# Altium PCB PADS_PCB_Yalovskyi.PcbDoc
Units mm, origin at the board's own origin, x right, y up, seen from the top; angles counter-clockwise.
Board outline 35 x 35 mm, 4 copper layers (Top Layer, PWR, GND, Bottom Layer), stack 0.603 mm thick; 57 components, 41 nets, 212 pads, 76 vias.
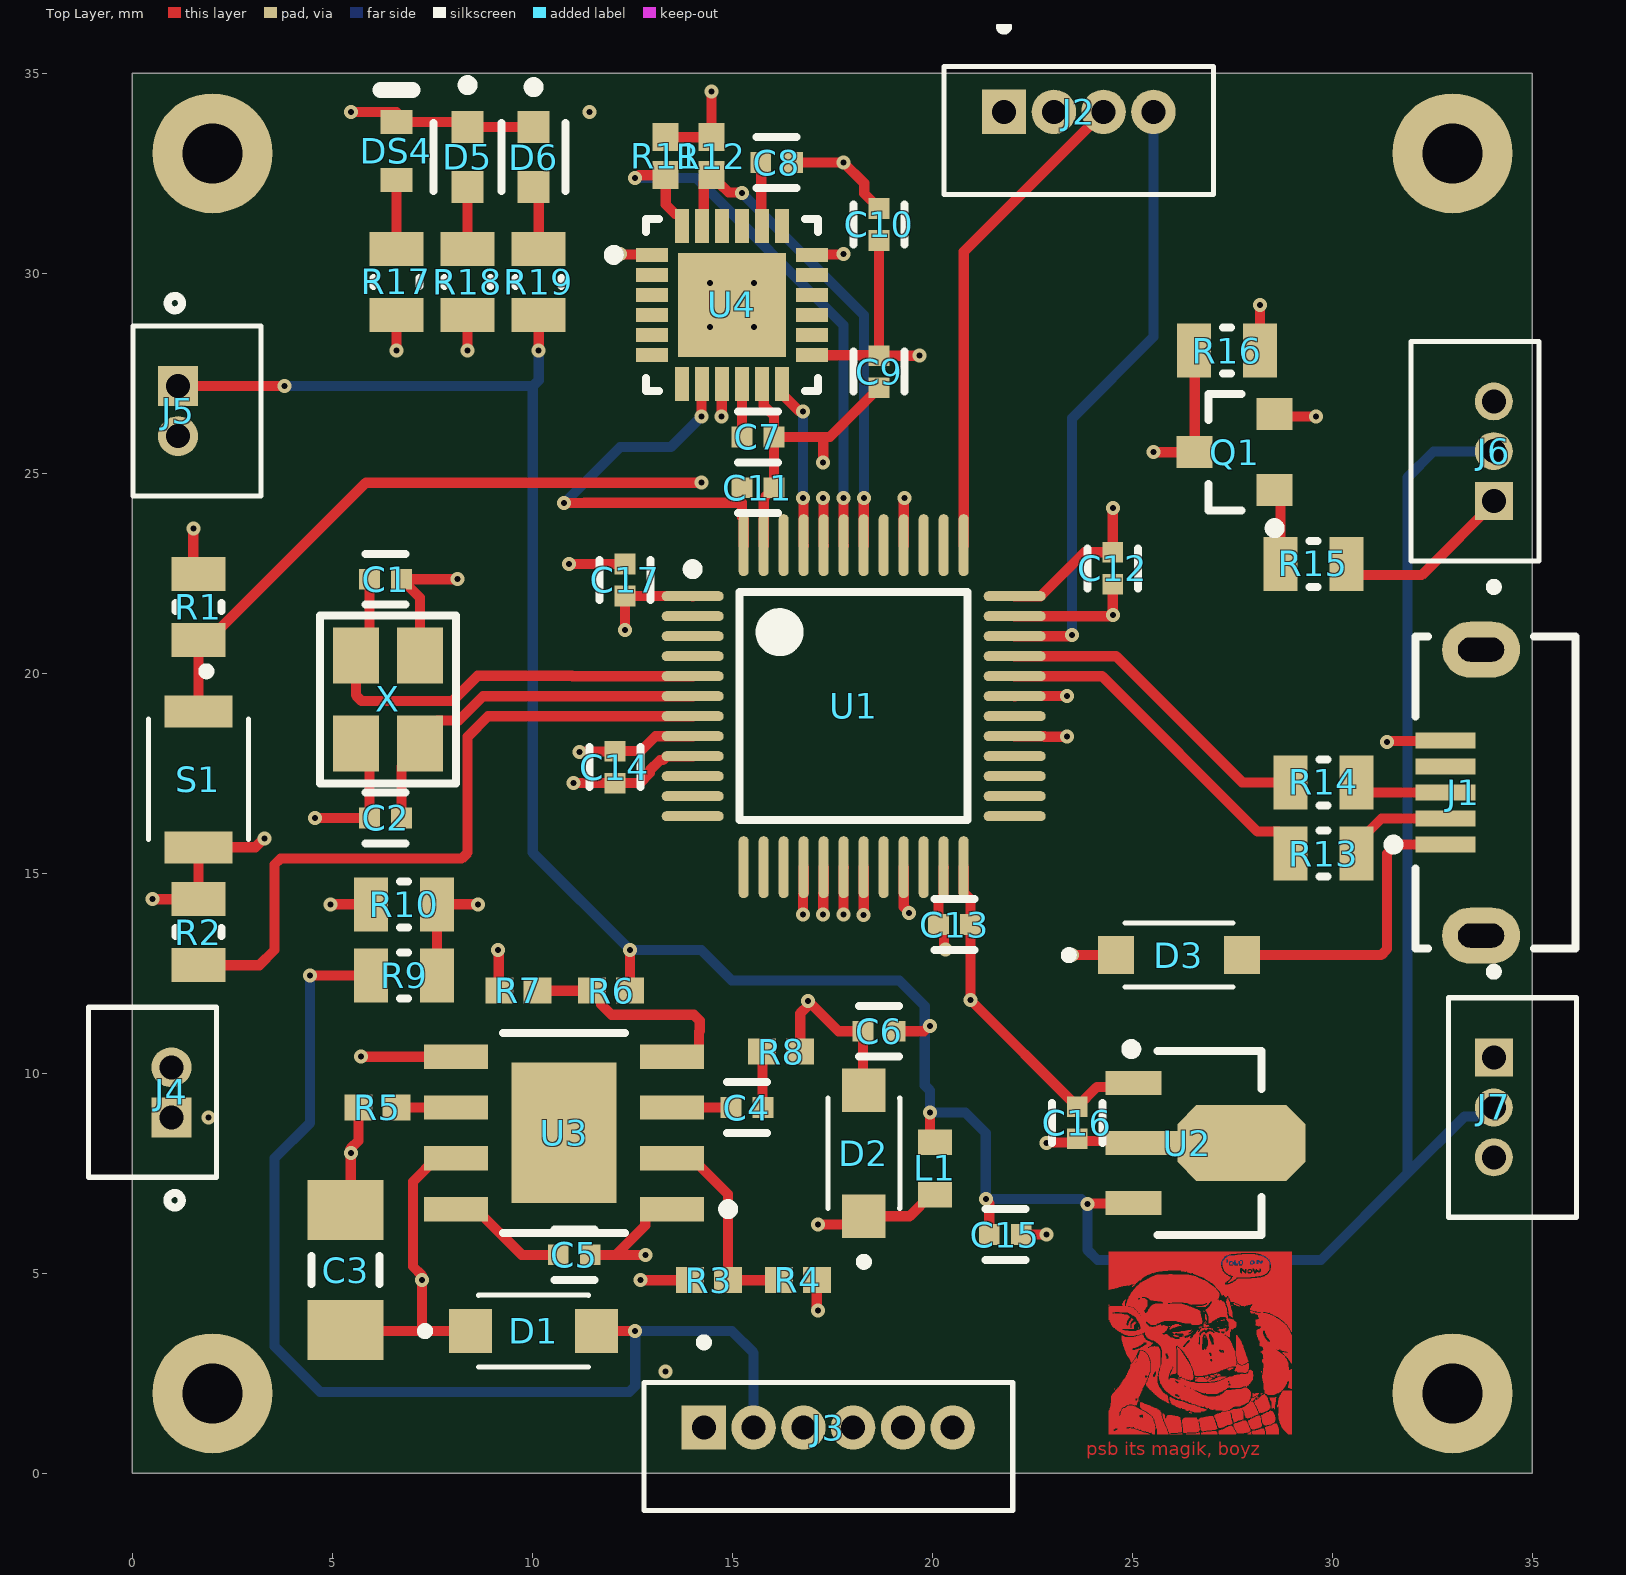
[diagram p0: Top Layer view]
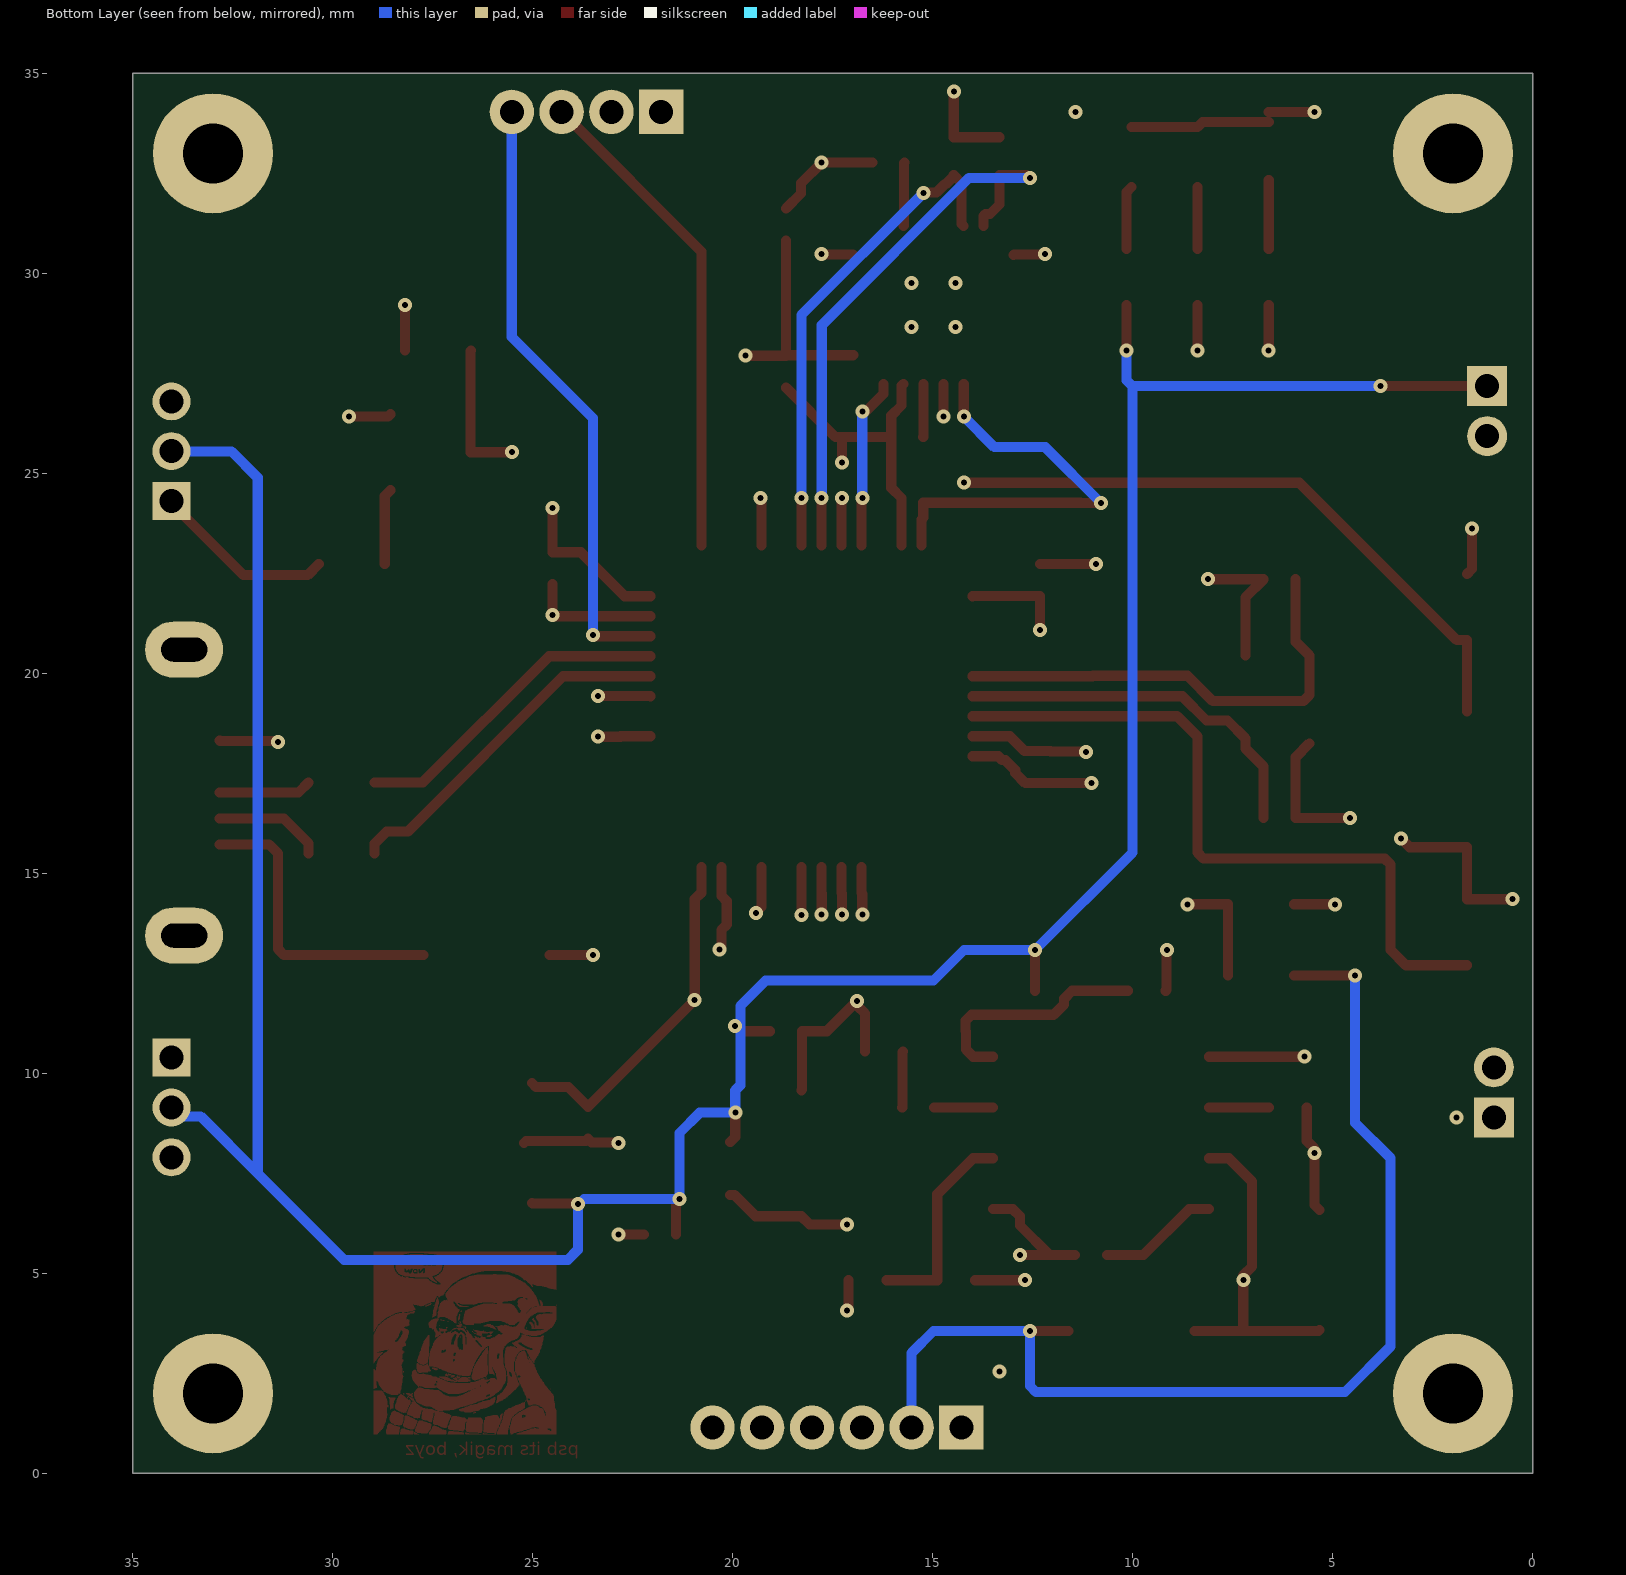
[diagram p1: Bottom Layer view, seen from below]
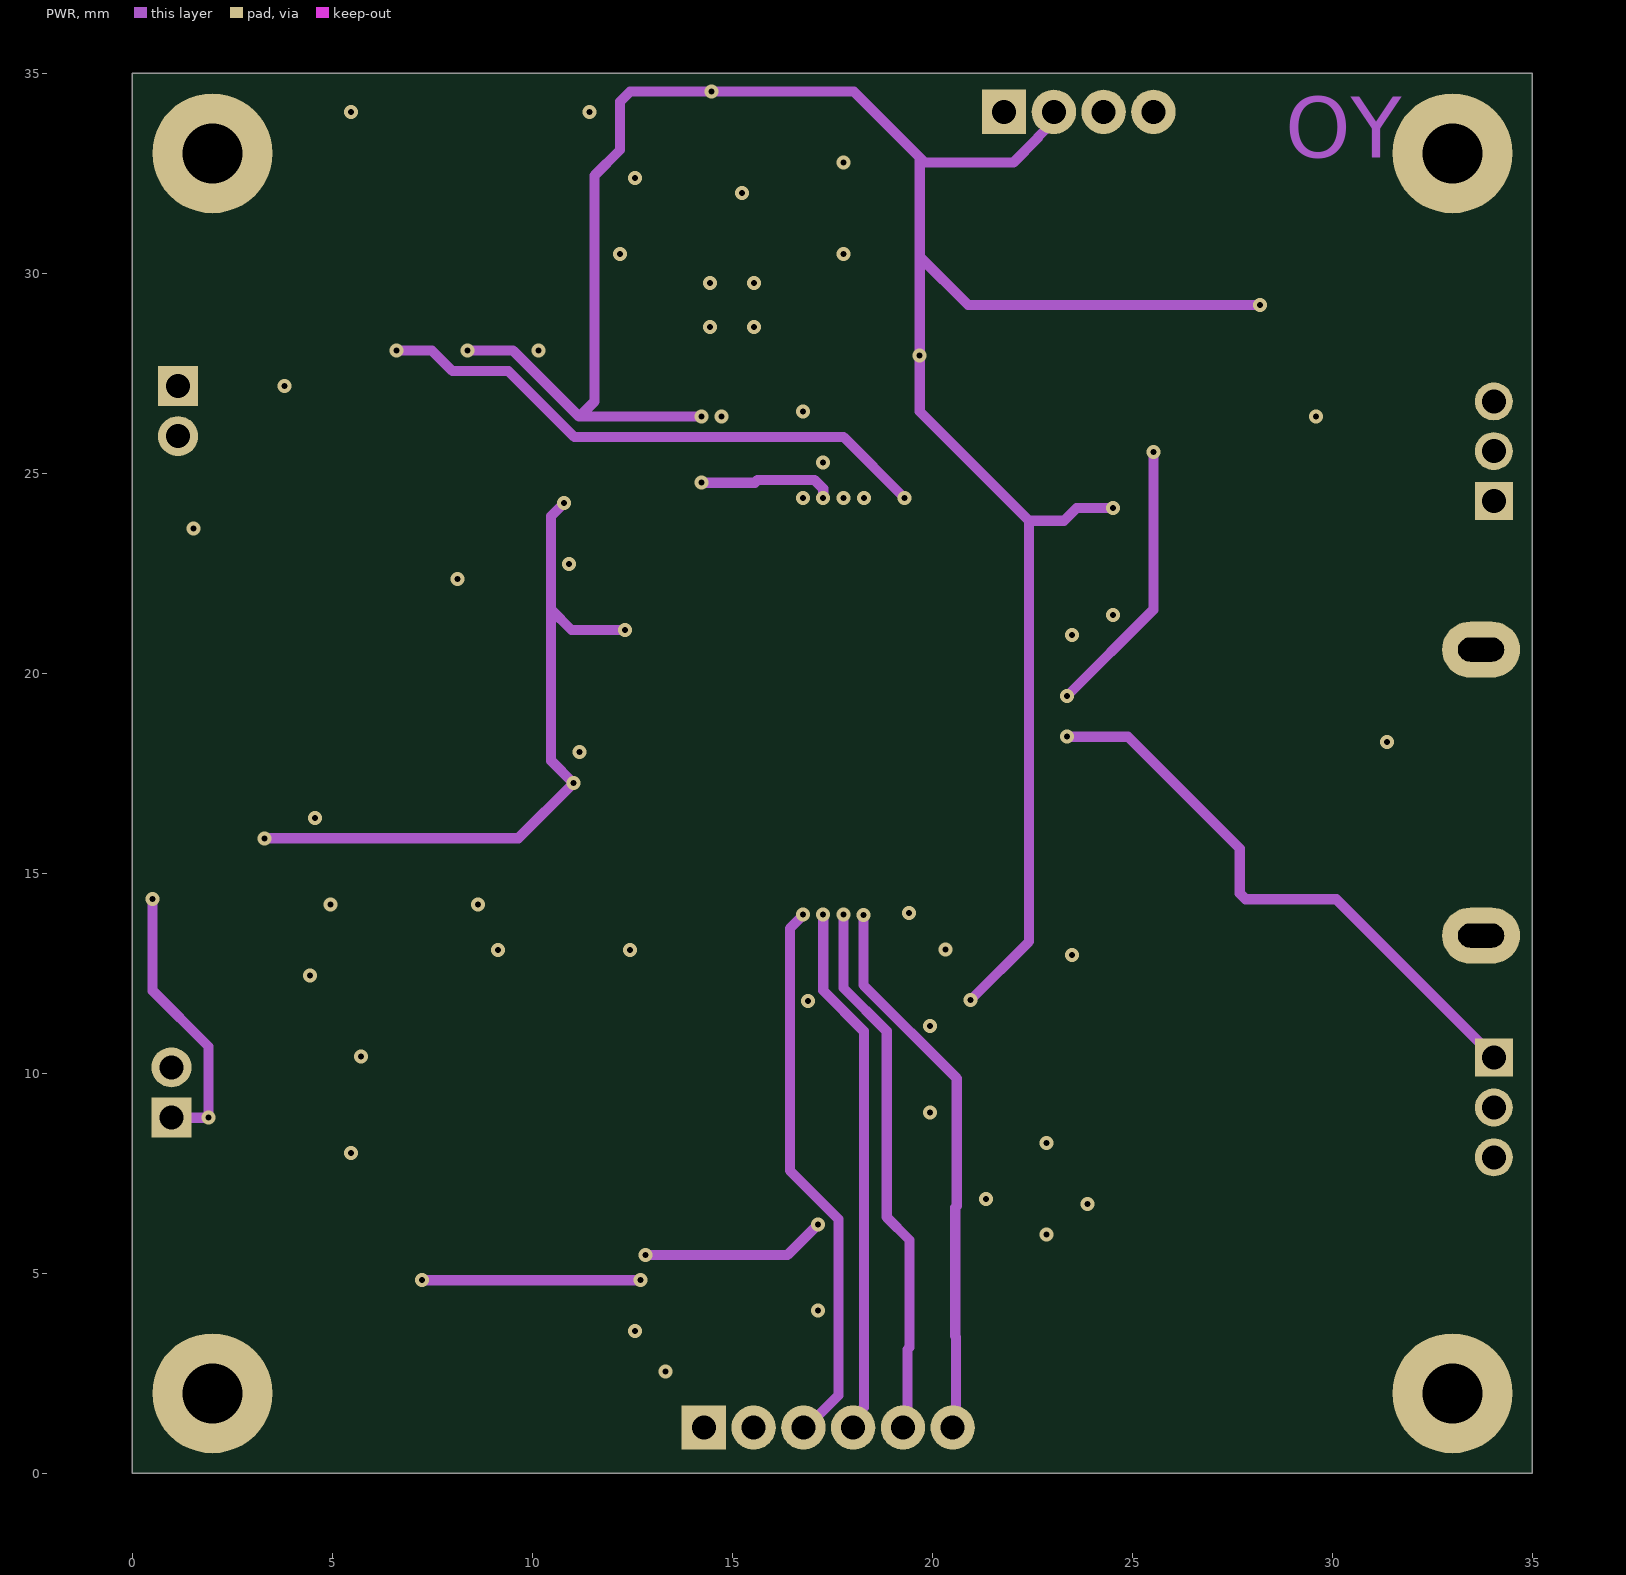
[diagram p2: PWR]
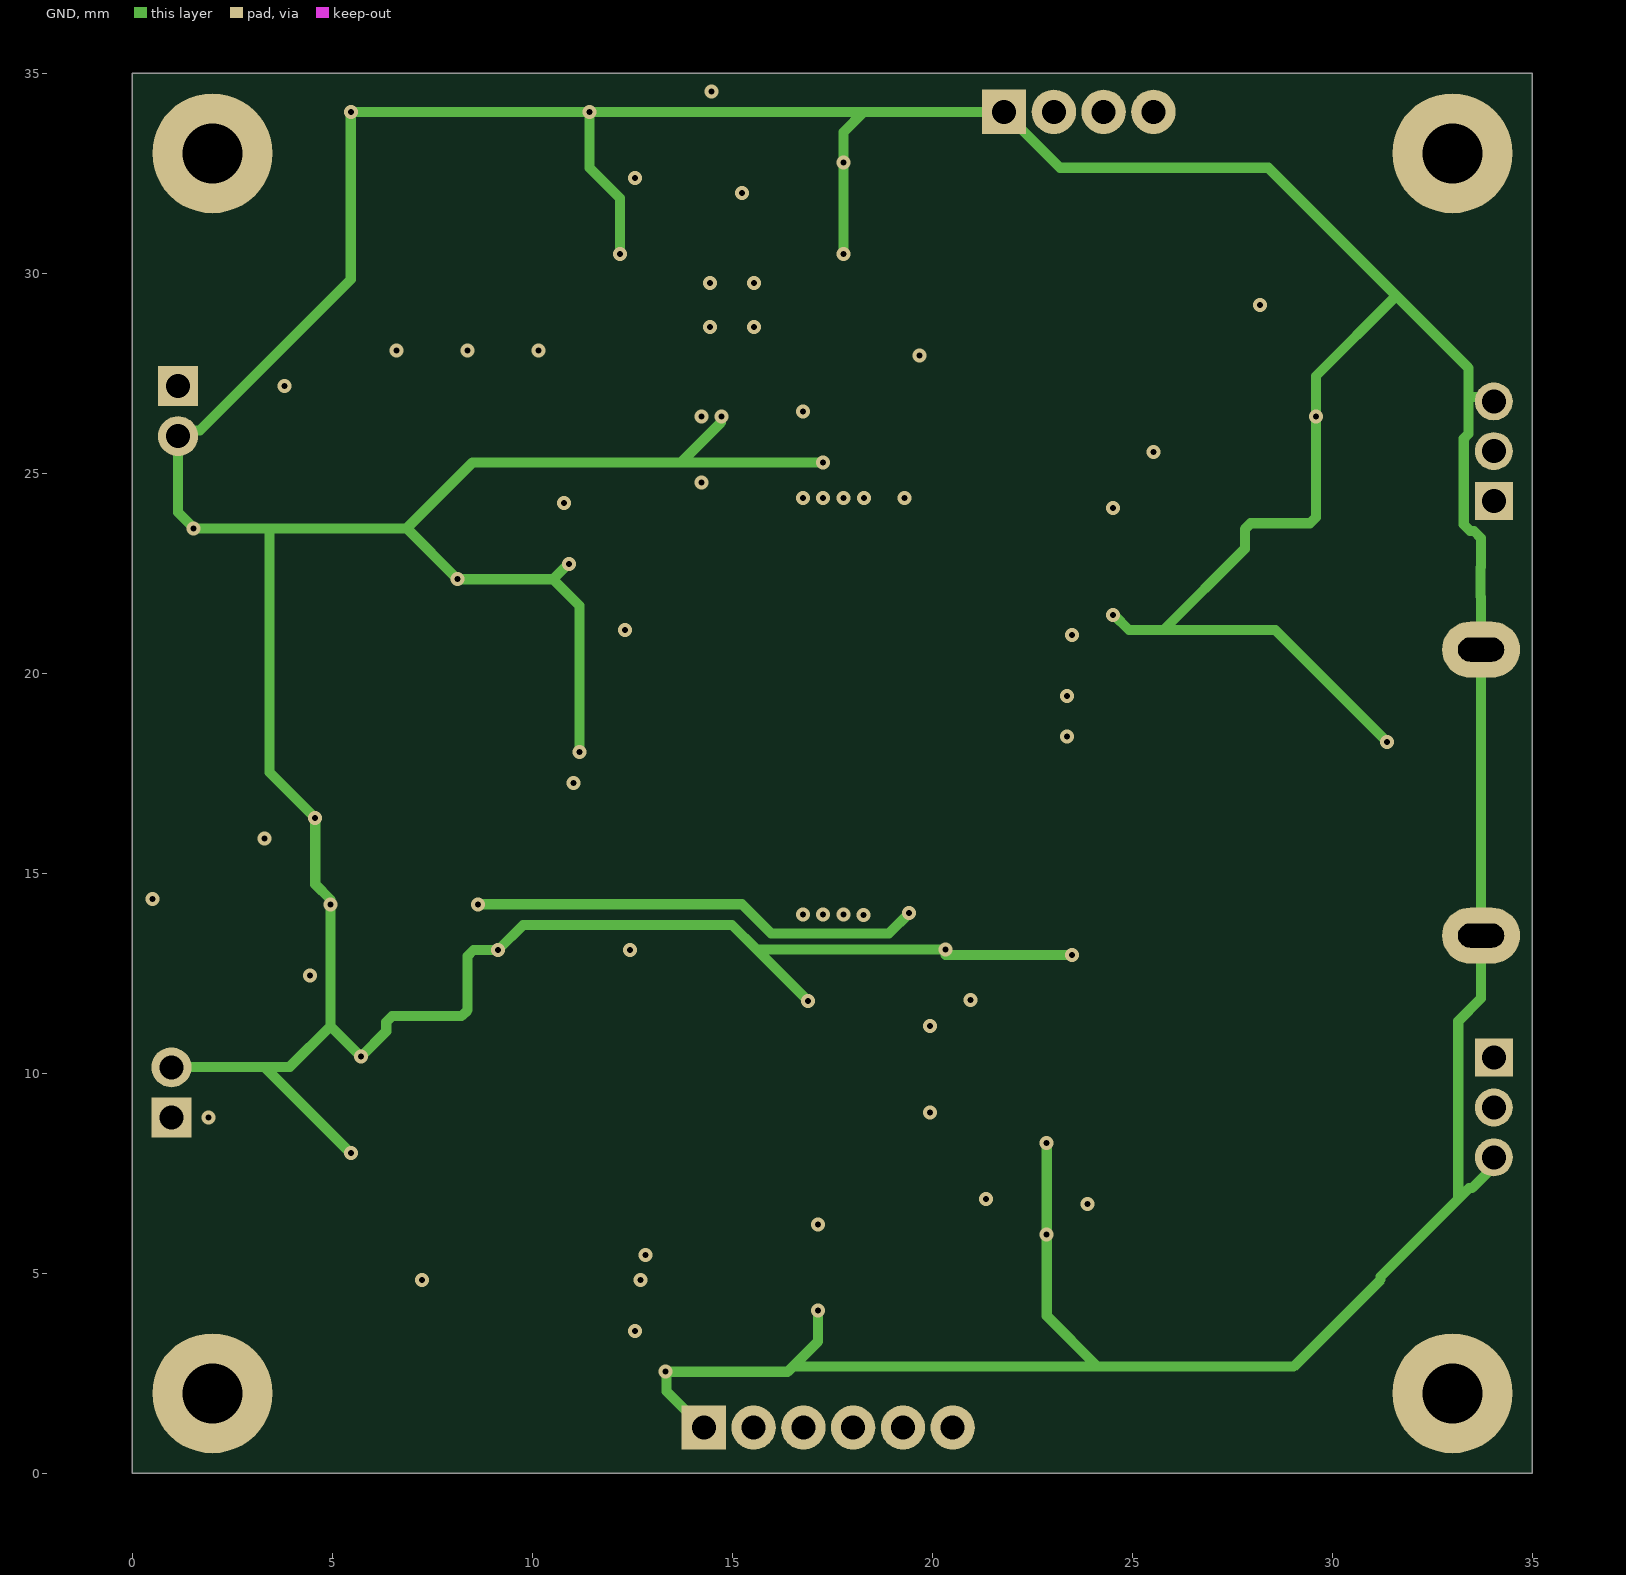
[diagram p3: GND]

## Layer stack, top to bottom
Top Solder: solder mask 0.0102, Solder Resist, Dk 3.5
Top Layer: signal copper 0.0356
Dielectric 2: prepreg 0.0711, PP-006, Dk 4.1
PWR: signal copper 0.035
Dielectric 1: dielectric 0.32, FR-4, Dk 4.8
GND: signal copper 0.035
Dielectric 3: prepreg 0.0711, PP-006, Dk 4.1
Bottom Layer: signal copper 0.0356
Bottom Solder: solder mask 0.0102, Solder Resist, Dk 3.5

## Board outline
0,0 35,0 35,35 0,35

## Design rules (kind name [scope] priority, off if disabled: settings)
Clearance [All] p1: gap=0.15 ignorepadtopadclearanceinfootprint=FALSE
PolygonConnect [All] p1: connectstyle=Relief reliefconductorwidth=0.254 reliefentries=4 polygonreliefangle="90 Angle" airgapwidth=0.254
RoutingVias [All] p1: holewidth=0.711 width=1.27 viastyle="Through Hole" minholewidth=0.711 minwidth=1.27 maxholewidth=0.711 maxwidth=1.27
SolderMaskExpansion [All] p1: expansion=0.102 istentingtop=FALSE
Width [All] p1: maxlimit=0.254 minlimit=0.254 preferedwidth=0.254
30 further rules are at their usual default settings.

## Classes and differential pairs
component class Sheet1: C1 C2 C3 C4 C5 C6 C7 C8 C9 C10 C11 C12 C13 C14 C15 C16 D2 D3 D4 D5 D6 DS4 J1 J2 J3 L1 Q1 R3 R4 R5 R6 R7 R8 R9 R10 R11 R13 R14 R15 R16 S1 S? U1 U3 U4 X

## Components (designator, comment, footprint, x,y, rotation, side; value= is the part's Value field where it differs from the comment)
C1 "20pF" FP-C0402-BB-MFG 6.331,22.352 r0 top value="0.10 μF"
C2 "20pF" FP-C0402-BB-MFG 6.331,16.383 r180 top value="0.10 μF"
C3 "10uF/50V" KEMT-1206-2_M 5.334,5.08 r90 top
C4 "150pF" FP-C0402-BB-MFG 15.367,9.144 r0 top value="0.10 μF"
C5 "100nF" FP-C0402-BB-MFG 11.049,5.461 r0 top value="0.10 μF"
C6 "22uF/16V" FP-C0402-BB-MFG 18.669,11.049 r180 top value="0.10 μF"
C7 "1pF" FP-C0402-BB-MFG 15.64,25.908 r0 top value="0.10 μF"
C8 "2.2nF" FP-C0402-BB-MFG 16.11,32.766 r0 top value="0.10 μF"
C9 "10nF" FP-C0402-BB-MFG 18.669,27.54 r90 top value="0.10 μF"
C10 "100nF" FP-C0402-BB-MFG 18.669,31.223 r90 top value="0.10 μF"
C11 "100nF" FP-C0402-BB-MFG 15.64,24.638 r0 top value="0.10 μF"
C12 "100nF" FP-C0402-BB-MFG 24.511,22.625 r270 top value="0.10 μF"
C13 "100nF" FP-C0402-BB-MFG 20.555,13.716 r180 top value="0.10 μF"
C14 "100nF" FP-C0402-BB-MFG 12.065,17.653 r90 top value="0.10 μF"
C15 "100nF" FP-C0402-BB-MFG 21.825,5.969 r0 top value="0.10 μF"
C16 "100nF" FP-C0402-BB-MFG 23.622,8.763 r270 top value="0.10 μF"
C17 "100nF" FP-C0402-BB-MFG 12.319,22.333 r90 top value="0.10 μF"
D1 "SS34LW" SODFL3718X102N 10.033,3.556 r0 top
D2 "SS34LW" SODFL3718X102N 18.288,8.001 r90 top
D3 "BAT42W" DIO_BAT42W_RHG 26.162,12.954 r0 top
D5 "" FP-LTST-C190GKT-MFG 8.382,32.905 r270 top
D6 "" FP-LTST-C191TBKT-MFG 10.033,32.905 r270 top
DS4 "" VISH-TLMX1100_V 6.604,33.057 r90 top
J1 "USB3140-30-0230-1-C" GCT-USB3140_V 33.274,17.018 r90 top
J2 "1734598-4" TE_1734598-4 23.66,34.036 r0 top
J3 "1734598-6" TE_1734598-6 17.399,1.143 r0 top
J4 "1734598-2" TE_1734598-2 0.508,9.525 r90 top
J5 "1734598-2" TE_1734598-2 1.613,26.553 r270 top
J6 "1734598-3" TE_1734598-3 34.036,24.308 r270 top
J7 "1734598-3" TE_1734598-3 34.036,10.389 r90 top
L1 "15uH/3A" INDC1608X90X30LL10T20 20.066,7.62 r90 top
Q1 "MMBTA42LT1G" ONSC-SOT-23-3-318-08_V 27.559,25.527 r180 top
R1 "10K" RESC2013X50X30LL20T20 1.651,21.653 r90 top
R2 "10K" RESC2013X50X30LL20T20 1.651,13.526 r270 top
R3 "100K" RESC1005X40X25ML05T10 14.415,4.826 r180 top
R4 "24K" RESC1005X40X25ML05T10 16.637,4.826 r180 top
R5 "100K" RESC1005X40X25ML05T10 6.129,9.144 r0 top
R6 "100K" RESC1005X40X25ML05T10 11.971,12.065 r0 top
R7 "39K" RESC1005X40X25ML05T10 9.652,12.065 r0 top
R8 "100K" RESC1005X40X25ML05T10 16.223,10.541 r180 top
R9 "100K" RESC2013X50X30LL20T20 6.794,12.446 r180 top
R10 "12K" RESC2013X50X30LL20T20 6.795,14.224 r0 top
R11 "4K7" RESC1005X40X25ML05T10 13.335,32.926 r270 top
R12 "4K7" RESC1005X40X25ML05T10 14.478,32.926 r270 top
R13 "22" RESC2013X50X30LL20T20 29.781,15.494 r180 top
R14 "22" RESC2013X50X30LL20T20 29.782,17.272 r180 top
R15 "4K7" RESC2013X50X30LL20T20 29.528,22.733 r0 top
R16 "4K7" RESC2013X50X30LL20T20 27.368,28.067 r0 top
R17 "1K" RESC2013X50X30LL20T20 6.604,29.782 r270 top
R18 "1K" RESC2013X50X30LL20T20 8.382,29.782 r270 top
R19 "1K" RESC2013X50X30LL20T20 10.16,29.782 r270 top
S1 "B3U-1000P" SW_B3U-1000P 1.651,17.35 r270 top
U1 "STM32F103C8T6" STM-LQFP48_L 18.034,19.177 r0 top
U2 "L78L05ABUTR" SOT-89_N 26.924,8.255 r0 top
U3 "MP1584EN-LF-Z" FP-MP1584EN-LF-Z-MFG 10.795,8.509 r180 top
U4 "MPU-6050" IS-QFN-24_V 14.986,29.21 r0 top
X "TSX-3225" TSX-3225 7.188,20.447 r270 top

## Footprints (in the part's own frame and the unit in brackets; to place one, negate y for a bottom-side part, rotate by r counter-clockwise, add the part's x,y. Pads: shape width x height; smd on the part's side, far side on the other; paste and mask are expansions set on the pad)
DIO_BAT42W_RHG [mm]
  rect 0.9x0.95 smd: A(1.575,0) C(-1.575,0)
  silkscreen extent -2.85,-0.8 1.35,0.8, body extent -1.8,-0.8 1.8,0.8, height 1.3
FP-C0402-BB-MFG [mm]
  rect 0.52x0.52 smd paste+0 mask+0: 1(-0.4,0) 2(0.4,0)
  silkscreen extent -0.5,-0.64 0.5,0.64, body extent -0.8,-0.4 0.8,0.4, height 0.25
FP-LTST-C190GKT-MFG [mm]
  rect 0.8x0.8 smd paste+0 mask+0: 1(-0.75,0) 2(0.75,0)
  silkscreen extent -1.92,-0.85 0.85,0.85, body extent -1.25,-0.55 1.25,0.55, height 0.25
FP-LTST-C191TBKT-MFG [mm]
  rect 0.8x0.8 smd paste+0 mask+0: 1(-0.75,0) 2(0.75,0)
  silkscreen extent -1.87,-0.8 0.85,0.8, body extent -1.25,-0.55 1.25,0.55, height 0.25
FP-MP1584EN-LF-Z-MFG [mm]
  rect 1.6x0.61 smd paste+0 mask+0: 1(-2.7,1.905) 2(-2.7,0.635) 3(-2.7,-0.635) 4(-2.7,-1.905) 5(2.7,-1.905) 6(2.7,-0.635) 7(2.7,0.635) 8(2.7,1.905)
  rect 2.62x3.51 smd paste+0 mask+0: 9(0,0)
  silkscreen extent -4.23,-2.5 1.53,2.5, body extent -3.6,-2.6 3.6,2.6, height 0.25
GCT-USB3140_V [mm] "USB, Micro B, Body 7.8x4mm, Pitch 0.65mm"
  rect 0.4x1.5 smd: 1(-1.3,0.445) 2(-0.65,0.445) 3(0,0.445) 4(0.65,0.445) 5(1.3,0.445)
  oval 1.4x1.95 hole 0.6 slot 1.15 at 90 deg: 6(-3.575,-0.445) 7(3.575,-0.445)
  silkscreen extent -3.9,-2.8 3.9,1.87, body extent -3.9,-2.81 3.9,1.19, height 6.55
INDC1608X90X30LL10T20 [mm] "Chip Inductor, 2-Leads, Body 1.7x0.9mm, IPC High Density"
  rect 0.64x0.84 smd: 1(-0.66,0) 2(0.66,0)
  body extent -0.85,-0.45 0.85,0.45, height 0.9
IS-QFN-24_V [mm] "QFN, 24-Leads, Body 4x4mm, Pitch 0.5mm, Thermal Pad 2.7x2.6mm"
  rect 0.8x0.35 smd: 1(-2,1.25) 2(-2,0.75) 3(-2,0.25) 4(-2,-0.25) 5(-2,-0.75) 6(-2,-1.25) 13(2,-1.25) 14(2,-0.75) 15(2,-0.25) 16(2,0.25) 17(2,0.75) 18(2,1.25)
  rect 0.35x0.85 smd mask+0.102: 7(-1.25,-1.975) 8(-0.75,-1.975) 9(-0.25,-1.975) 10(0.25,-1.975) 11(0.75,-1.975) 12(1.25,-1.975) 19(1.25,1.975) 20(0.75,1.975) 21(0.25,1.975) 22(-0.25,1.975) 23(-0.75,1.975) 24(-1.25,1.975)
  rect 2.7x2.6 smd: 25(0,0)
  silkscreen extent -3.07,-2.15 2.15,2.15, body extent -2,-2 2,2, height 0.95
KEMT-1206-2_M [mm] "SMD, 2-Leads, Body 3.4x1.8mm, IPC Low Density"
  rect 1.5x1.9 smd: 1(-1.5,0) 2(1.5,0)
  silkscreen extent -0.35,-0.85 0.35,0.85, body extent -1.7,-0.9 1.7,0.9, height 0.88
ONSC-SOT-23-3-318-08_V [mm] "SOT23, 3-Leads, Body 2.92x1.3mm, Pitch 0.95mm"
  rect 0.9x0.8 smd: 1(-1,0.95) 2(-1,-0.95) 3(1,0)
  silkscreen extent -1.13,-1.46 0.65,2.02, body extent -0.65,-1.46 0.65,1.46, height 1.11
RESC1005X40X25ML05T10 [mm] "Chip Resistor, 2-Leads, Body 1.00x0.50mm, IPC Low Density"
  rect 0.7x0.65 smd: 1(-0.475,0) 2(0.475,0)
  body extent -0.53,-0.27 0.53,0.28, height 0.4
RESC2013X50X30LL20T20 [mm] "Chip Resistor, 2-Leads, Body 2.00x1.25mm, IPC High Density"
  rect 0.85x1.35 smd: 1(-0.825,0) 2(0.825,0)
  silkscreen extent -0.1,-0.58 0.1,0.58, body extent -1.1,-0.72 1.1,0.72, height 0.5
SODFL3718X102N [mm]
  rect 1.08x1.09 smd: A(1.575,0) C(-1.575,0)
  silkscreen extent -2.81,-0.9 1.38,0.9, body extent -1.85,-0.9 1.85,0.9, height 1.02
SOT-89_N [mm] "SOT89, 3-Leads, Body 4.5x2.4 mm, Pitch 1.5mm, Lead Span 4.1mm, IPC Medium Density"
  rect 1.4x0.6 smd: 1(-1.9,1.5) 3(-1.9,-1.5)
  rect 1.8x0.6 smd: 2(-1.7,0)
  oct 3.2x1.9 smd: 2(0.8,0)
  silkscreen extent -2.07,-2.3 1.3,2.47, body extent -1.3,-2.3 1.3,2.3, height 1.6
STM-LQFP48_L [mm] "QFP, 48-Leads, Body 7x7mm, Pitch 0.5mm, IPC High Density"
  oval 1.55x0.25 smd: 1(-4.025,2.75) 2(-4.025,2.25) 3(-4.025,1.75) 4(-4.025,1.25) 5(-4.025,0.75) 6(-4.025,0.25) 7(-4.025,-0.25) 8(-4.025,-0.75) 9(-4.025,-1.25) 10(-4.025,-1.75) 11(-4.025,-2.25) 12(-4.025,-2.75) 25(4.025,-2.75) 26(4.025,-2.25) 27(4.025,-1.75) 28(4.025,-1.25) 29(4.025,-0.75) 30(4.025,-0.25) 31(4.025,0.25) 32(4.025,0.75) 33(4.025,1.25) 34(4.025,1.75) 35(4.025,2.25) 36(4.025,2.75)
  oval 0.25x1.55 smd: 13(-2.75,-4.025) 14(-2.25,-4.025) 15(-1.75,-4.025) 16(-1.25,-4.025) 17(-0.75,-4.025) 18(-0.25,-4.025) 19(0.25,-4.025) 20(0.75,-4.025) 21(1.25,-4.025) 22(1.75,-4.025) 23(2.25,-4.025) 24(2.75,-4.025) 37(2.75,4.025) 38(2.25,4.025) 39(1.75,4.025) 40(1.25,4.025) 41(0.75,4.025) 42(0.25,4.025) 43(-0.25,4.025) 44(-0.75,4.025) 45(-1.25,4.025) 46(-1.75,4.025) 47(-2.25,4.025) 48(-2.75,4.025)
  silkscreen extent -4.15,-2.85 2.85,3.55, body extent -3.5,-3.5 3.5,3.5, height 1.6
SW_B3U-1000P [mm]
  rect 0.8x1.7 smd: 1(-1.7,0) 2(1.7,0)
  silkscreen extent -2.8,-1.25 1.5,1.25
TE_1734598-2 [mm]
  rect 1x1 hole 0.6: 1(-0.625,-0.47)
  round 1 hole 0.6: 2(0.625,-0.47)
  silkscreen extent -2.88,-1.6 2.12,1.6
TE_1734598-3 [mm]
  rect 0.95x0.95 hole 0.6: 1(0,0)
  round 0.95 hole 0.6: 2(-1.245,0) 3(-2.489,0)
  silkscreen extent -3.99,-2.07 2.25,1.13
TE_1734598-4 [mm]
  rect 1.108x1.108 hole 0.6: 1(-1.867,0)
  round 1.108 hole 0.6: 2(-0.622,0) 3(0.622,0) 4(1.867,0)
  silkscreen extent -3.37,-2.07 3.37,2.23
TE_1734598-6 [mm]
  rect 1.108x1.108 hole 0.6: 1(-3.111,0)
  round 1.108 hole 0.6: 2(-1.867,0) 3(-0.622,0) 4(0.622,0) 5(1.867,0) 6(3.111,0)
  silkscreen extent -4.61,-2.07 4.61,2.23
TSX-3225 [mm]
  rect 1.4x1.15 smd: 1(0,-1.6) 2(2.2,-1.6) 3(2.2,0) 4(0,0)
  silkscreen extent -1,-2.5 3.2,0.9
VISH-TLMX1100_V [mm] "SMD, 2-Leads, Body 1.6x0.8mm"
  rect 0.6x0.8 smd: 1(-0.725,0) 2(0.725,0)
  silkscreen extent 1.53,-0.4 1.53,0.4, body extent -0.8,-0.4 0.8,0.4, height 0.65

## Part data
C1 C2 C4 C5 C6 C7 C8 C9 C10 C11 C12 C13 C14 C15 C16 C17: library part CMP-2008-02046-2, "CAP CER 0.1UF 10V X5R 0402", Capacitance="0.10 μF", Manufacturer=Kemet, Manufacturer Part Number=C0402C104K8PACTU, Package=C0402-BB, Temperature="-55°C to +125°C", Temperature Characteristic=X5R, Temperature Coefficient=15%, Temperature Range High=+125°C, Temperature Range Low=-55°C, Tolerance=0.1, Voltage Rating="10 V", Automotive=No, Category=Cap, ComponentLink2Description=Datasheet, ComponentLink2URL=https://content.kemet.com/datasheets/KEM_C1002_X7R_SMD.pdf, Device Class L1="Passive Components", Device Class L2=Capacitors, Device Class L3="Ceramic Capacitors", Digikey Description="CAP CER 0.1UF 10V X5R 0402", Height=0.55mm, Ipc Land Pattern Name=CAPC10050X50, Lead Free=Yes, Material=Ceramic, Mouser Description="Capacitor 100 nF 10 VDC 0402", Octopart=https://octopart.com/c0402c104k8pactu-kemet-140039, RoHS=TRUE
C3: library part CMP-1037-04202-2, "CAP, Ceramic, 0.1 uF, +/- 10%, 50 V, -55 to 125 degC, 1206 (3216 Metric), RoHS, Tape and Reel", Capacitance=0.1µF, Capacitance Tolerance=±10%, Capacitor Case Style=1206[3216Metric], Dielectric Characteristic=X7R, Manufacturer=Kemet, Operating Temperature Max=125degC, Operating Temperature Min=-55degC, Package Description="2-Leads SMD, Body 3.2 x 1.6 mm", Package Reference=1206-2, Voltage Rating=50V, Datasheet URL=https://datasheet.ciiva.com/6125/1725438-6125494.pdf, Datasheet Version=Jul-13, Manufacturer URL=http://www.kemet.com/, Packaging=Tape&Reel, Product Range=KEMET-CSeries, SVHC=ToBeAdvised
D1 D2: "3A, 40V, Schottky Rectifier", Package="SOD-123W-2 Taiwan Semiconductor", Availability="In Stock", Check_prices=https://www.snapeda.com/parts/SS34LW/Taiwan+Semiconductor/view-part/?ref=eda, MF="Taiwan Semiconductor", MP=SS34LW, Price=None, Purchase-URL=https://pricing.snapeda.com/search/part/SS34LW/?ref=eda, SnapEDA_Link=https://www.snapeda.com/parts/SS34LW/Taiwan+Semiconductor/view-part/?ref=snap
D3: library part BAT42W_RHG, "SOD-123, 30V, 0.2A, Schottky Diode", Package="SOD-123-2 Taiwan Semiconductor", Availability="In Stock", Check_prices=https://www.snapeda.com/parts/BAT42W%20RHG/Taiwan+Semiconductor/view-part/?ref=eda, MF="Taiwan Semiconductor Corporation", MP="BAT42W RHG", Price=None, Purchase-URL="https://pricing.snapeda.com/search/part/BAT42W RHG/?ref=eda", SnapEDA_Link=https://www.snapeda.com/parts/BAT42W%20RHG/Taiwan+Semiconductor/view-part/?ref=snap
D5: library part CMP-22017-000005-2, "LED GREEN CLEAR CHIP SMD", Case Code (Imperial)=0603, Case Code (Metric)=1608, Color=Green, Forward Current=30mA, Forward Voltage=2.1V, Lens Color=Colorless, Max Operating Temperature=85°C, Min Operating Temperature=-55°C, Package Quantity=1, Power Dissipation=100mW, Reverse Voltage=5V, Test Current=10mA, Voltage=2V, Case/Package=0603, Depth=0.8mm, Dominant Wavelength=569nm, Height=0.8mm, Illumination Color=Green, Lead Free="Lead Free", Length=1.6mm, Lens Style=Clear, Lens Transparency=Clear, Luminous Intensity=6mcd, Mount="Surface Mount", Number of Elements=1, Number of LEDs=1, Number of Pins=2, Packaging="Tape and Reel", Power Rating=100mW, Radiation Hardening=No, Viewing Angle=130°, Wavelength=565nm, Width=0.8mm
D6: library part CMP-22017-000008-1, "LED BLUE CLEAR CHIP SMD", Case Code (Imperial)=0603, Case Code (Metric)=1608, Color=Blue, Forward Current=20mA, Forward Voltage=3.8V, Lens Color=Colorless, Max Operating Temperature=80°C, Max Power Dissipation=75mW, Min Operating Temperature=-20°C, Package Quantity=1, Power Dissipation=76mW, Reverse Voltage=5V, Case/Package=0603, Depth=1.6mm, Dominant Wavelength=475nm, Height=0.55mm, Illumination Color=Blue, Lead Free="Lead Free", Length=0.8mm, Lens Style=Diffused, Lens Transparency=Clear, Luminous Intensity=180mcd, Mount="Surface Mount", Number of Elements=1, Number of LEDs=1, Number of Pins=2, Packaging="Tape and Reel", Radiation Hardening=No, Test Current=20mA, Viewing Angle=130°, Wavelength=468nm, Width=0.8mm
DS4: library part CMP-1666-00027-1, "LED, RED, 2.1 V, -40 to 100 degC, 2-Pin SMD (0603), RoHS, Tape and Reel", Capacitance="12 pF", Case Code (Imperial)=0603, Case Code (Metric)=1608, Max Operating Temperature=125degC, Min Operating Temperature=-55degC, Package Quantity=4000, Resistance="100000000000 Ohm", Tolerance=5%, Type (Capacitors)=C0G, Voltage Rating="50 V", Case/Package=0603, ComponentLink1Description="Manufacturer URL", ComponentLink1URL=http://www.vishay.com/, ComponentLink2Description=Datasheet, ComponentLink2URL=http://www.vishay.com/docs/83173/tlmb1100.pdf, DatasheetVersion="Rev. 2.7, 03/2016", Height="0.8 mm", Length="1.6 mm", Mount="Surface Mount", PackageDescription="2-Pin Surface Mount Device, Body 1.6 x 0.8 mm", PackageReference=TLMX1100, Packaging="Tape and Reel", Pins=2, Radiation Hardening=No, REACH SVHC="No SVHC", RoHSCompliant=True, Voltage Rating (DC)="50 V", Width="0.8 mm"
J1: library part CMP-2000-07368-1, "Micro USB Receptacle, Type B, SMT, Vertical, with Through-Hole Shell Stakes, -30 to 85 degC, 5-Pin SMD, RoHS, Tape and Reel", Manufacturer="Global Connector Technology", Package Description="5-Pin Surface Mount Device, Body 7.8 x 4 mm, Pitch 0.65 mm", Package Reference=USB3140, Connector Mounting=PCB, Connector Type=USB2.0MicroB, Contact Material=Copper, Contact Plating=Gold, Contact Termination=SurfaceMountVertical, Datasheet URL=http://www.farnell.com/datasheets/1913332.pdf, Datasheet Version="Rev. B2, 04/2015", Gender=Receptacle, Manufacturer URL=http://gct.co/, Mounting Technology=SurfaceMount, No. of Contacts=5, No. of Positions=5, No. of Rows=1, Orientation=Vertical, PartNumber=USB3140, Pitch=0.65mm, Series=USB3140, SVHC=NoSVHC(19-Dec-2012)
J2: "Conn High Performance Interconnect HDR 4 POS 1.25mm Solder ST Thru-Hole Tube", Package=None, Digi-Key_Part_Number=A99916-ND, Digi-Key_Purchase_URL=https://www.digikey.com/product-detail/en/te-connectivity-amp-connectors/1734598-4/A99916-ND/2074075?utm_source=snapeda&utm_medium=aggregator&utm_campaign=symbol, EU_RoHS_Compliance=Compliant, MF="TE Connectivity", MP=1734598-4, SnapEDA_Link=https://www.snapeda.com/parts/1734598-4/TE%20Connectivity%20AMP%20Connectors/view-part/2374854/?ref=snap, TE_purchase_URL=https://www.te.com/usa-en/product-1734598-4.html?te_bu=Cor&te_type=disp&te_campaign=seda_glo_cor-seda-global-disp-prtnr-fy19-seda-model-bom-cta_sma-317_1&elqCampaignId=32493
J3: "1.25 WTB HDR DIP, 6 POS", Package=None, Availability=Unavailable, Centerline_Pitch="1.25 mm[.049 in]", EU_RoHS_Compliance=Compliant, MF="TE Connectivity", MP=1734598-6, Number_of_Positions=6, Price=None, Product_Type=Connector, SnapEDA_Link=https://www.snapeda.com/parts/1734598-6/TE%20Connectivity%20AMP%20Connectors/view-part/502603/?ref=snap, TE_purchase_URL=https://www.te.com/usa-en/product-1734598-6.html?te_bu=Cor&te_type=disp&te_campaign=seda_glo_cor-seda-global-disp-prtnr-fy19-seda-model-bom-cta_sma-317_1&elqCampaignId=32493
J4 J5: "Conn Shrouded Header HDR 2 POS 1.25mm Solder ST Thru-Hole Tube", Package=None, Availability=Unavailable, MF="{'manufacturer': 'TE Connectivity'}", MP=1734598-2, Price=None
J6 J7: "Conn Shrouded Header HDR 3 POS 1.25mm Solder ST Thru-Hole Tube", Package=None, Availability=Good, EU_RoHS_Compliance=Compliant, MF="TE Connectivity", MP=1734598-3, Price=None, Purchase-URL=https://pricing.snapeda.com/search/part/1734598-3/?ref=eda, SnapEDA_Link=https://www.snapeda.com/parts/1734598-3/TE%20Connectivity%20AMP%20Connectors/view-part/2374853/?ref=snap
L1: library part CMP-2000-05913-1, "Unshielded Wirewound Inductor, 33 nH, 350 mA, -55 to 150 degC, 0603 (1608 Metric), RoHS, Tape and Reel", Current - Saturation=-, Current Rating=350mA, DC Resistance (DCR)=600mOhmMax, Frequency - Self Resonant=3GHz, Frequency - Test=100MHz, Inductance=33nH, Manufacturer=EPCOS-(TDK), Package / Case=0603(1608Metric), Package Description="2-Pin Surface Mount Device, Body 1.6 x 0.8 mm", Package Reference=0603, Q @ Freq=14@100MHz, Ratings=AEC-Q200, Tolerance=±5%, Category=Inductors,Coils,Chokes, Datasheet URL=https://en.tdk.eu/inf/30/db/ind_2008/b82496c.pdf, Datasheet Version=07/2016, Family=FixedInductors, Height - Seated (Max)="0.035\"(0.90mm)", Manufacturer URL=http://www.tdk.com/, Material - Core=Ceramic, Mounting Technology=SurfaceMount, Mounting Type=SurfaceMount, Operating temperature=-, Packaging=CutTape(CT), Series=SIMID, Shielding=Unshielded, Size / Dimension="0.063\"Lx0.031\"W(1.60mmx0.80mm)", Type=Wirewound
Q1: library part CMP-1048-00662-1, "High Voltage Transistor, NPN Silicon, 3-Pin SOT-23, Pb-Free, Tape and Reel", Manufacturer="On Semiconductor", ComponentLink1Description="Manufacturer URL", ComponentLink1URL=http://www.onsemi.com/, ComponentLink2Description=Datasheet, ComponentLink2URL=http://www.onsemi.cn/pub_link/Collateral/MMBTA42LT1-D.PDF, ComponentLink3Description="Package Specification", ComponentLink3URL=http://www.onsemi.cn/pub_link/Collateral/318-08.PDF, DatasheetVersion="Rev. 12", fT Min (MHz)=50, IC Continuous (A)=0.5, Mounting Technology="Surface Mount", PackageDescription="3-Pin Small Outline Transistor, Body 2.92 x 1.3 mm, Pitch 0.95 mm", PackageReference=SOT-23-3-318-08, PackageVersion="Rev. AP, 11/2009", Packing="Tape and Reel", PartNumber=MMBTA42LT1G, Polarity=NPN, RoHS=TRUE
R1 R2 R9 R10 R13 R14 R15 R16 R17 R18 R19: library part CMP-2001-04896-1, Manufacturer="Vishay Dale", Part Number=CRCW08050000Z0EA
R3 R4 R5 R6 R7 R8 R11 R12: library part CMP-2002-03041-1, Manufacturer="Vishay Dale", Part Number=CRCW04020000Z0EDHP
S1: "Switch Tactile N.O. SPST Round Button Gull Wing 0.05A 12VDC 1.5N SMD Embossed T/R", Package=None, Availability=Unavailable, MP=B3U-1000P, Price=None
U1: library part CMP-0237-00215-3, "ARM Cortex-M3 32-bit MCU, 64 KB Flash, 20 KB Internal RAM, 37 I/Os, 48-pin LQFP, -40 to 85 degC, Tray", I/Os (High Current)=37, Operating Frequency(F) (Processor speed) (MHz)=72, Supply Voltage(Vcc) min (V)=2, A/D Converter="2x12-bit (10 Channel)", ComponentLink1Description="Manufacturer URL", ComponentLink1URL=http://www.st.com/web/en/home.html, ComponentLink2Description=Datasheet, ComponentLink2URL=http://www.st.com/st-web-ui/static/active/en/resource/technical/document/datasheet/CD00161566.pdf, ComponentLink3Description="Package Specification", ComponentLink3URL=http://www.st.com/st-web-ui/static/active/en/resource/technical/document/datasheet/DM00058181.pdf, Core="ARM Cortex-M3", DatasheetVersion="Rev. 16", FLASH Size (Prog) (kB)=64, Internal RAM Size (kB)=20, Mounting Technology="Surface Mount", PackageDescription="48-Pin Low Profile Quad Flat Package, 7 x 7 mm Body, 0.5 mm Pitch", PackageReference=LQFP48, PackageVersion="Rev. 6, 06/2013", Packing=Tray, PartNumber=STM32F103C8T6
U2: library part CMP-0244-00406-1, "Positive Voltage Regulator, 5V, 4-Pin SOT-89, Tape and Reel", ComponentLink1Description="Manufacturer URL", ComponentLink1URL=http://www.st.com, ComponentLink2Description=Datasheet, ComponentLink2URL=http://www.st.com/internet/com/TECHNICAL_RESOURCES/TECHNICAL_LITERATURE/DATASHEET/CD00000446.pdf, DatasheetVersion=1/02/2011, PackageDescription="3-Pin SOT-89 Package 1.5 mm Pitch, 4.1 mm Lead Span", PackageReference=SOT-89, PackageVersion=2011
U3: library part CMP-57379-000006-1, "IC REG BUCK ADJ 3A", Ambient Temperature Range High=+85°C, Ambient Temperature Range Low=-20°C, Manufacturer="Monolithic Power Systems", Max Junction Temp=+125°C, Max Power Dissipation=2.5W, Max Supply Voltage=28V, Min Supply Voltage=4.5V, Nominal Supply Current=100uA, Output Current=3A, Output Voltage=0.8-25V, Switching Frequency=100-1500kHz, Temperature="-20°C to +125°C", Automotive=No, Category=IC, ComponentLink2Description=Datasheet, ComponentLink2URL=https://www.monolithicpower.com/en/documentview/productdocument/index/doc_url/L01QMTU4NF9yMS4wLnBkZg%3D%3D/release_date/MjAwOS0wNC0wOSAwMDowMDowMA%3D%3D/, Device Class L1="Integrated Circuits (ICs)", Device Class L2="Power Management ICs", Device Class L3="Voltage Regulators - Switching", Digikey Description="IC REG BUCK ADJ 3A", Height=1.7mm, Ipc Land Pattern Name=SOIC127P600X150-8, Lead Free=Yes, Manufacturer Part Number=MP1584EN-LF-Z, Number Of Outputs=1, Octopart=https://octopart.com/mp1584en-lf-z-monolithic+power+systems-18629680, Output Type=AdjustableProgrammable, Package=MP1584EN-LF-Z, RoHS=TRUE, Standoff Height=0mm, Switching Topology=Buck, Temperature Range High=+125°C, Temperature Range Low=-20°C
U4: library part CMP-1753-00002-2, "3-Axis Gyroscope, Accelerometer and a Digital Motion Processor(TM) (DMP), 2.375 to 3.46 V, -40 to 85 degC, 24-Pin QFN, RoHS, Tape and Reel", Manufacturer=InvenSense, Standard Package=5,000, Category=Sensors,Transducers, Datasheet URL=http://datasheet.octopart.com/MPU-6050-InvenSense-datasheet-14421344.pdf, Datasheet Version="Rev. 3.3, 05/2012", Dynamic Catalog=MPU-6000™Series, Family=Multifunction, Featured Product=MPU-60506-Axis,IntegratedI²CSolution, Manufacturer URL=http://www.invensense.com/, Online Catalog=MPU-6000™Series, Other Names="1428-1007-2 / MPU6050", Output Type=Digital, Sensor Type=MotionTracking, Unit PriceUSD=Digital
X: "16MHz Â±10ppm Crystal 9pF 60 Ohms 4-SMD, No Lead", Package="SMD-4 Epson", Availability=Unavailable, MF=EPSON, MP=TSX-3225, Price=None, SnapEDA_Link=https://www.snapeda.com/parts/TSX-3225/EPSON/view-part/557780/?ref=snap

## Free pads (board coordinates)
  round 3 hole 1.5: MH1(2,33) MH2(33,33) MH3(2,2) MH4(33,2)

## Via types
v1: diameter 0.35, hole 0.15, Top Layer to Bottom Layer, 76 vias

## Nets (pads, with @x,y where several pads share a name; then routed paths per layer and width w, separated by ;. In a path a pad name is that pad's centre, name@x,y a point inside that pad or via, vN(x,y) a via of type N, cw(c..) or ccw(c..) an arc to the next point about the centre after c; other vN are vias at no path point)
+3V3: C9.2 C10.1 C11.1 C12.1 C13.1 C14.1 C16.1 C17.1 J2.2 J4.1 R2.1 R11.1 R12.1 R16.2 R18.2 S1.2 U1.1 U1.9 U1.24 U1.36 U1.48 U2.1 U4.8 U4.13 | length 129.7
  Top Layer w0.254: v1(0.508,14.351) R2.1 S1.2 3.077,15.65 v1(3.302,15.875) ; v1(8.382,28.067) R18.2@8.382,29.211 ; v1(10.795,24.257) 11.303,24.257 11.311,24.265 15.24,24.265 15.24,23.892 15.284,23.848 U1.48 ; v1(11.03,17.253) C14.1 12.687,17.253 12.94,17.506 12.94,17.576 13.192,17.829 13.265,17.829 13.363,17.927 U1.9 ; v1(12.319,21.082) C17.1 12.323,21.929 U1.1 U1.1 ; R11.1 R12.1 v1(14.478,34.544) ; v1(14.224,26.416) 14.23,26.422 14.23,27.229 U4.8 ; U4.13 16.996,27.95 18.659,27.95 C9.2 ; C10.1 C9.2 ; v1(19.685,27.94) C9.2 ; U1.24 20.784,14.506 20.786,14.504 20.806,14.504 20.955,14.355 C13.1 v1(20.955,11.83) C16.1 24.114,9.655 24.924,9.655 U2.1 ; U1.36 22.705,21.927 23.803,23.025 C12.1 v1(24.511,24.13) ; R16.2 v1(28.194,29.21) v1(28.194,29.21)
  PWR w0.254: v1(0.508,14.351) 0.508,12.065 1.905,10.668 v1(1.905,8.89) ; J4.1@0.889,8.91 0.909,8.89 1.865,8.89 v1@1.885,8.91 ; v1(3.302,15.875) 9.652,15.875 v1(11.03,17.253) 10.47,17.813 10.47,21.59 ; v1(8.382,28.067) 9.521,28.067 11.172,26.416 ; v1(10.795,24.257) 10.47,23.932 10.47,21.59 ; v1(12.319,21.082) 10.978,21.082 10.47,21.59 ; v1(14.224,26.416) 11.172,26.416 ; v1(20.955,11.83) 22.415,13.29 22.415,23.812 ; J2.2 23.038,33.805 22.641,33.408 22.641,33.385 22.023,32.766 19.812,32.766 19.685,32.893 ; v1(24.511,24.13) 23.609,24.13 23.292,23.812 22.415,23.812 ; v1(28.194,29.21) 20.892,29.21 19.685,30.416 ; 11.172,26.416 11.557,26.801 11.557,32.448 12.192,33.083 12.192,34.29 12.446,34.544 v1(14.478,34.544) 18.034,34.544 19.685,32.893 ; 19.685,30.416 19.685,32.893 ; 19.685,30.416 v1(19.685,27.94) 19.685,26.543 22.415,23.812
  Bottom Layer w0.254: v1(10.795,24.257) 12.192,25.654 13.462,25.654 v1(14.224,26.416)
+5: C6.1 C15.1 J5.1 J6.2 J7.2 L1.2 R6.2 R19.2 U2.3 | length 80.8
  Top Layer w0.254: J5.1@0.937,27.178 v1(3.81,27.178) ; J5.1@1.133,27.168 J5.1 ; v1(10.16,28.067) R19.2@10.16,29.211 ; R6.2 v1(12.446,13.081) ; C6.1 19.786,11.049 19.917,11.18 v1(19.943,11.18) ; v1(19.939,9.017) 19.939,8.407 L1.2 ; v1(21.336,6.858) 21.336,6.832 21.425,6.743 C15.1 ; v1(23.876,6.731) 23.888,6.743 25.012,6.743 U2.3
  Bottom Layer w0.254: v1(3.81,27.178) 10.011,27.178 ; v1(10.16,28.067) 10.16,27.327 10.011,27.178 ; v1(19.943,11.18) v1@19.812,11.18 ; J7.2@34.163,9.042 34.044,8.923 33.307,8.923 31.877,7.493 ; J6.2@34.163,25.629 34.079,25.545 32.53,25.545 31.877,24.892 31.877,7.493 ; 10.011,27.178 10.011,15.516 v1(12.446,13.081) 14.224,13.081 14.986,12.319 19.177,12.319 19.812,11.684 v1@19.812,11.18 ; v1@19.812,11.18 19.812,9.7 19.939,9.573 v1(19.939,9.017) 20.828,9.017 21.336,8.509 v1(21.336,6.858) 23.723,6.858 23.85,6.731 v1(23.876,6.731) 23.876,5.588 24.13,5.334 29.718,5.334 31.877,7.493
GND: C1.2 C2.2 C3.2 C6.2 C7.2 C8.2 C9.1 C10.2 C11.2 C12.2 C13.2 C14.2 C15.2 C16.2 C17.2 D2.A D3.C D5.1 D6.1 DS4.2 J1.5 J1.6 J1.7 J2.1 J3.1 J4.2 J5.2 J6.3 J7.3 Q1.2 R1.2 R4.1 R5.1 R7.1 R8.1 R10.1 U1.8 U1.23 U1.35 U1.47 U2.2 U3.5 U4.1 U4.9 U4.11 U4.18 X.2 X.4 | length 251.7
  Top Layer w0.254: v1(1.524,23.622) 1.524,22.605 R1.2 ; v1(4.572,16.383) C2.2 5.931,17.904 X.2 ; v1(4.953,14.224) R10.1 ; C3.2 5.461,6.707 v1(5.461,8.001) 5.461,8.122 5.654,8.315 R5.1 ; v1(5.461,34.036) DS4.2@6.604,34.036 ; v1(5.715,10.414) U3.5 ; DS4.2 8.255,33.782 D5.1 D6.1 ; X.4 7.188,21.895 C1.2 v1(8.128,22.352) ; v1(9.144,13.081) 9.16,13.065 9.16,12.081 R7.1 ; v1(10.922,22.733) C17.2 ; v1(11.176,18.034) 11.185,18.043 12.056,18.043 C14.2 12.706,18.053 13.078,18.425 14.007,18.425 U1.8 ; v1(12.192,30.48) 12.202,30.47 12.976,30.47 U4.1 ; v1(14.732,26.416) 14.734,26.418 14.734,27.233 U4.9 ; U4.11 15.784,27.187 15.784,26.695 16.04,26.439 C7.2 ; U1.47 15.784,24.382 C11.2 C7.2 ; C8.2 v1(17.78,32.766) 18.297,32.249 18.297,31.995 C10.2 ; R8.1 16.698,11.497 16.891,11.69 v1(16.891,11.811) 17.653,11.049 C6.2 18.269,9.595 D2.A ; U4.18 16.996,30.47 17.77,30.47 v1(17.78,30.48) ; R4.1 17.112,4.123 17.145,4.09 v1(17.145,4.064) ; v1@17.298,25.273 v1(17.272,25.273) 17.272,25.908 ; C9.1 17.437,25.908 17.272,25.908 ; U1.23 20.282,15.15 20.282,14.431 20.155,14.304 C13.2 20.288,13.583 20.288,13.162 20.332,13.119 v1(20.332,13.093) ; U1.35 24.449,21.427 24.485,21.463 v1(24.511,21.463) C12.2 ; C15.2 v1(22.86,5.969) ; v1(22.86,8.255) 22.878,8.273 23.532,8.273 C16.2 23.676,8.309 25.17,8.309 U2.2@25.224,8.255 ; v1(23.495,12.954) D3.C ; Q1.2 28.62,26.416 v1(29.591,26.416) ; v1(31.369,18.288) 31.384,18.303 32.814,18.303 J1.5 ; C7.2 17.272,25.908
  GND w0.254: J4.2@0.889,10.16 3.302,10.16 ; v1(5.461,8.001) 3.302,10.16 ; v1(10.922,22.733) 10.898,22.733 10.517,22.352 ; v1(11.176,18.034) 11.176,21.693 10.517,22.352 ; v1(12.192,30.48) 12.192,31.877 11.43,32.639 v1(11.43,34.036) ; J3.1@14.389,1.016 13.353,2.052 13.353,2.522 v1(13.335,2.54) 16.383,2.54 16.51,2.667 ; v1(14.732,26.416) 14.714,26.398 14.714,26.266 13.72,25.273 ; v1(16.891,11.811) 15.609,13.093 ; v1(17.145,4.064) 17.145,3.302 16.51,2.667 ; v1(17.272,25.273) 13.72,25.273 ; v1(17.78,30.48) v1(17.78,32.766) 17.78,33.528 18.288,34.036 ; v1(22.86,8.255) v1(22.86,5.969) 22.86,3.937 24.13,2.667 ; v1(23.495,12.954) 20.332,12.954 v1(20.332,13.093) 15.609,13.093 ; v1(24.511,21.463) 24.535,21.463 24.916,21.082 25.781,21.082 ; v1(31.369,18.288) 28.575,21.082 25.781,21.082 ; J7.3@34.163,7.798 33.495,7.13 33.419,7.13 33.147,6.858 ; J6.3@34.163,26.873 34.13,26.906 33.419,26.906 33.401,26.924 ; 3.302,10.16 3.937,10.16 4.953,11.176 ; 3.429,23.622 v1(1.524,23.622) 1.524,23.646 1.143,24.027 J5.2 1.286,26.071 1.687,26.071 5.461,29.845 v1(5.461,34.036) v1(11.43,34.036) ; 3.429,23.622 6.858,23.622 ; 3.429,23.622 3.429,17.526 v1(4.572,16.383) 4.572,14.726 4.953,14.345 v1(4.953,14.224) 4.953,11.176 ; 4.953,11.176 v1(5.715,10.414) 6.35,11.049 6.35,11.281 6.499,11.43 8.233,11.43 8.382,11.579 8.382,12.932 8.531,13.081 v1(9.144,13.081) 9.771,13.708 14.994,13.708 15.609,13.093 ; 6.858,23.622 8.509,25.273 13.72,25.273 ; 6.858,23.622 v1(8.128,22.352) 10.517,22.352 ; v1(11.43,34.036) 18.288,34.036 ; 16.51,2.667 24.13,2.667 ; 18.288,34.036 J2.1 23.19,32.639 28.397,32.639 31.597,29.439 ; 24.13,2.667 29.032,2.667 31.207,4.842 31.207,4.918 33.147,6.858 ; 25.781,21.082 27.813,23.114 27.813,23.6 27.962,23.749 29.442,23.749 29.591,23.898 v1(29.591,26.416) 29.591,27.432 31.597,29.439 ; 31.597,29.439 33.401,27.635 33.401,26.924 ; 33.147,6.858 33.147,11.303 33.719,11.875 J1.6 J1.7 33.719,21.907 33.701,21.925 33.701,22.637 33.719,22.656 33.719,23.377 33.54,23.556 33.446,23.556 33.284,23.718 33.284,25.864 33.401,25.981 33.401,26.924
IMU_INT: U1.45 U4.12 | length 4.3
  Top Layer w0.254: U4.12 16.236,26.985 16.66,26.561 16.746,26.561 v1(16.764,26.543) ; v1(16.764,24.384) 16.782,24.366 16.782,23.204 U1.45
  Bottom Layer w0.254: v1(16.764,24.384) v1(16.764,26.543)
IMU_SCL: R12.2 U1.42 U4.23 | length 12.4
  Top Layer w0.254: U4.23 14.284,31.233 14.284,32.257 R12.2 14.478,32.426 14.676,32.228 14.701,32.228 14.907,32.022 15.222,32.022 v1(15.24,32.004) ; U1.42 18.286,23.204 18.286,24.382 v1(18.288,24.384)
  Bottom Layer w0.254: v1(15.24,32.004) 18.288,28.956 v1(18.288,24.384)
IMU_SDA: R11.2 U1.43 U4.24 | length 14.5
  Top Layer w0.254: v1(12.573,32.385) 12.599,32.385 12.665,32.451 R11.2 13.335,31.72 13.572,31.483 13.688,31.483 13.736,31.435 U4.24 ; v1(17.78,24.384) 17.782,24.382 17.782,23.204 U1.43
  Bottom Layer w0.254: v1(12.573,32.385) 14.097,32.385 17.78,28.702 v1(17.78,24.384)
LED_control: R17.2 U1.40 | length 16.6
  Top Layer w0.254: v1(6.604,28.067) R17.2@6.604,29.211 ; U1.40 19.286,23.204 19.286,24.366 v1(19.304,24.384)
  PWR w0.254: v1(6.604,28.067) 7.493,28.067 8.001,27.559 9.398,27.559 11.051,25.906 17.782,25.906 v1(19.304,24.384)
NetC1_1: C1.1 U1.5 X.1 | length 11.8
  Top Layer w0.254: C1.1 5.931,20.79 X.1 5.588,19.453 5.737,19.304 8.001,19.304 8.636,19.939 10.993,19.939 11.005,19.927 U1.5
NetC2_1: C2.1 U1.6 X.3 | length 9.4
  Top Layer w0.254: C2.1 6.731,17.665 7.188,18.122 7.188,18.372 7.636,18.82 8.16,18.82 8.767,19.427 U1.6
NetC3_1: C3.1 D1.C R3.2 U3.7 | length 15
  Top Layer w0.254: C3.1 5.358,3.556 7.239,3.556 ; U3.7 7.6,7.874 7.018,7.292 7.018,5.168 7.239,4.947 v1(7.239,4.826) 7.239,3.556 ; D1.C 7.239,3.556 ; v1(12.7,4.826) R3.2
  PWR w0.254: v1(7.239,4.826) v1(12.7,4.826)
NetC4_1: C4.1 U3.3 | length 1.5
  Top Layer w0.254: U3.3 C4.1
NetC4_2: C4.2 R8.2 | length 1.4
  Top Layer w0.254: R8.2 15.757,10.532 15.757,9.153 C4.2
NetC5_1: C5.1 U3.8 | length 3
  Top Layer w0.254: U3.8 8.59,6.604 9.733,5.461 C5.1
NetC5_2: C5.2 D2.C L1.1 U3.1 | length 11.3
  Top Layer w0.254: C5.2 12.09,5.461 ; v1(12.827,5.461) 12.09,5.461 ; U3.1 13,6.604 12.822,6.426 12.822,6.193 12.09,5.461 ; v1(17.145,6.223) 18.085,6.223 D2.C 19.432,6.426 19.966,6.96 L1.1
  PWR w0.254: v1(12.827,5.461) 16.383,5.461 v1(17.145,6.223)
NetC7_1: C7.1 U4.10 | length 1.3
  Top Layer w0.254: U4.10 15.238,27.233 15.238,25.91 C7.1
NetC8_1: C8.1 U4.20 | length 1.6
  Top Layer w0.254: C8.1 15.723,32.753 15.723,31.198 U4.20
NetD5_2: D5.2 R18.1 | length 1.5
  Top Layer w0.254: R18.1 D5.2
NetD6_2: D6.2 R19.1 | length 1.6
  Top Layer w0.254: D6.2 10.16,32.028 R19.1
NetDS4_1: DS4.1 R17.1 | length 1.7
  Top Layer w0.254: R17.1 DS4.1
NetJ1_2: J1.2 R13.1 | length 2.7
  Top Layer w0.254: R13.1 30.606,15.744 31.23,16.368 J1.2
NetJ1_3: J1.3 R14.1 | length 2.3
  Top Layer w0.254: R14.1 30.861,17.018 J1.3
NetQ1_1: Q1.1 R15.1 | length 1.9
  Top Layer w0.254: Q1.1 28.703,24.433 R15.1
NetR1_1: R1.1 S1.1 U1.44 | length 20.6
  Top Layer w0.254: S1.1 R1.1 1.901,20.828 5.838,24.765 v1(14.224,24.765) ; v1(17.272,24.384) 17.282,24.374 17.282,23.204 U1.44
  PWR w0.254: v1(14.224,24.765) 15.565,24.765 15.636,24.836 17.052,24.836 17.272,24.616 v1(17.272,24.384)
NetR2_2: R2.2 U1.7 | length 17.9
  Top Layer w0.254: R2.2 3.176,12.701 3.556,13.081 3.556,15.218 3.705,15.367 8.233,15.367 8.382,15.516 8.382,18.415 8.894,18.927 U1.7
NetR3_1: R3.1 R4.2 U3.2 | length 5.2
  Top Layer w0.254: U3.2 13.99,7.874 14.89,6.974 R3.1 R4.2
NetR5_2: R5.2 U3.6 | length 1.5
  Top Layer w0.254: R5.2 U3.6
NetR6_1: R6.1 R7.2 U3.4 | length 5.9
  Top Layer w0.254: R7.2 R6.1 11.521,12.065 11.719,11.867 11.719,11.725 11.981,11.463 14.036,11.463 14.185,11.314 14.185,11.06 14.168,11.043 14.168,10.592 13.99,10.414 U3.4
PPM: J7.1 U1.29 | length 16.1
  Top Layer w0.254: U1.29 22.061,18.425 22.802,18.425 22.812,18.415 v1(23.368,18.415)
  PWR w0.254: v1(23.368,18.415) 24.892,18.415 27.686,15.621 27.686,14.5 27.835,14.351 30.099,14.351 J7.1@34.163,10.287
SBUS: J6.1 R15.2 | length 4.7
  Top Layer w0.254: R15.2 30.632,22.454 32.233,22.454 J6.1@34.163,24.384
SWCLK: J2.3 U1.37 | length 12.3
  Top Layer w0.254: U1.37 20.784,30.538 J2.3
SWDIO: J2.4 U1.34 | length 15.4
  Top Layer w0.254: U1.34 23.467,20.927 v1(23.495,20.955)
  Bottom Layer w0.254: v1(23.495,20.955) 23.495,26.377 25.527,28.409 J2.4
TIM3_S1: J3.3 U1.16 | length 15.1
  Top Layer w0.254: v1(16.764,13.97) 16.764,14.486 16.784,14.506 U1.16
  PWR w0.254: v1(16.764,13.97) 16.764,13.944 16.439,13.619 16.439,7.568 17.653,6.354 17.653,1.95 16.885,1.182 J3.3@16.885,1.022
TIM3_S2: J3.4 U1.17 | length 14.6
  Top Layer w0.254: v1(17.272,13.97) 17.272,14.494 17.284,14.506 U1.17
  PWR w0.254: v1(17.272,13.97) 17.272,12.069 18.288,11.053 18.288,1.641 18.122,1.475 J3.4@18.122,1.016
TIM3_S3: J3.5 U1.18 | length 14.8
  Top Layer w0.254: v1(17.78,13.97) 17.78,14.498 17.782,14.5 17.782,15.15 U1.18
  PWR w0.254: v1(17.78,13.97) 17.78,12.133 18.86,11.053 18.86,6.403 19.431,5.832 19.431,3.149 19.38,3.098 J3.5@19.38,1.016
TIM3_S4: J3.6 U1.19 | length 15.1
  Top Layer w0.254: v1(18.28,13.962) 18.286,13.968 18.286,15.15 U1.19
  PWR w0.254: v1(18.28,13.962) 18.28,12.204 20.611,9.873 20.611,6.682 20.574,6.645 20.574,3.429 20.592,3.411 20.592,1.048 J3.6@20.624,1.016
UART1_RX: Q1.3 R16.1 U1.31 | length 11.9
  Top Layer w0.254: U1.31 22.061,19.429 22.81,19.429 22.812,19.431 v1(23.368,19.431) ; v1(25.527,25.527) Q1.3 26.559,28.051 R16.1
  PWR w0.254: v1(23.368,19.431) 25.527,21.59 v1(25.527,25.527)
USB_DN: R13.2 U1.32 | length 8.9
  Top Layer w0.254: U1.32 24.245,19.927 28.13,16.042 28.658,16.042 28.956,15.744 R13.2
USB_DP: R14.2 U1.33 | length 8.2
  Top Layer w0.254: U1.33 24.594,20.427 27.749,17.272 R14.2
VBAT: D1.A J3.2 R9.2 | length 28.1
  Top Layer w0.254: v1(4.445,12.446) R9.2 ; D1.A v1(12.573,3.556)
  Bottom Layer w0.254: v1(4.445,12.446) 4.445,8.763 3.556,7.874 3.556,3.175 4.699,2.032 12.424,2.032 12.573,2.181 v1(12.573,3.556) 14.986,3.556 15.532,3.01 J3.2
VBUS: D3.A J1.1 | length 7.6
  Top Layer w0.254: D3.A 31.22,12.954 31.369,13.103 31.369,15.494 31.593,15.718 J1.1
Voltage_meter: R9.1 R10.2 U1.21 | length 15.3
  Top Layer w0.254: R9.1 R10.2 R10.2 v1(8.636,14.224) ; U1.21 19.286,15.15 19.286,14.164 19.423,14.028 v1(19.423,14.002)
  GND w0.254: v1(8.636,14.224) 15.24,14.224 15.967,13.497 18.918,13.497 v1(19.423,14.002)
pads on no net: J1.4 U1.2 U1.3 U1.4 U1.10 U1.11 U1.12 U1.13 U1.14 U1.15 U1.20 U1.22 U1.25 U1.26 U1.27 U1.28 U1.30 U1.38 U1.39 U1.41 U1.46 U3.9 U4.2 U4.3 U4.4 U4.5 U4.6 U4.7 U4.14 U4.15 U4.16 U4.17 U4.19 U4.21 U4.22 U4.25
copper on no net:
  other v1: 14.436,28.66 15.536,28.66 14.436,29.76 15.536,29.76

## Other copper
Top Layer:
  drawing of 83 lines, arcs and shapes, not listed
  text "psb its magik, boyz" at 23.843,0.456 h0.32
PWR:
  text "OY" at 28.829,32.893 h1.52

## Silkscreen, mask and mechanical layers (free items; w line width, h text height)
Mechanical 1:
  the board outline again, w0.254